# Allegro board SMA_Prototype_Drain.brd
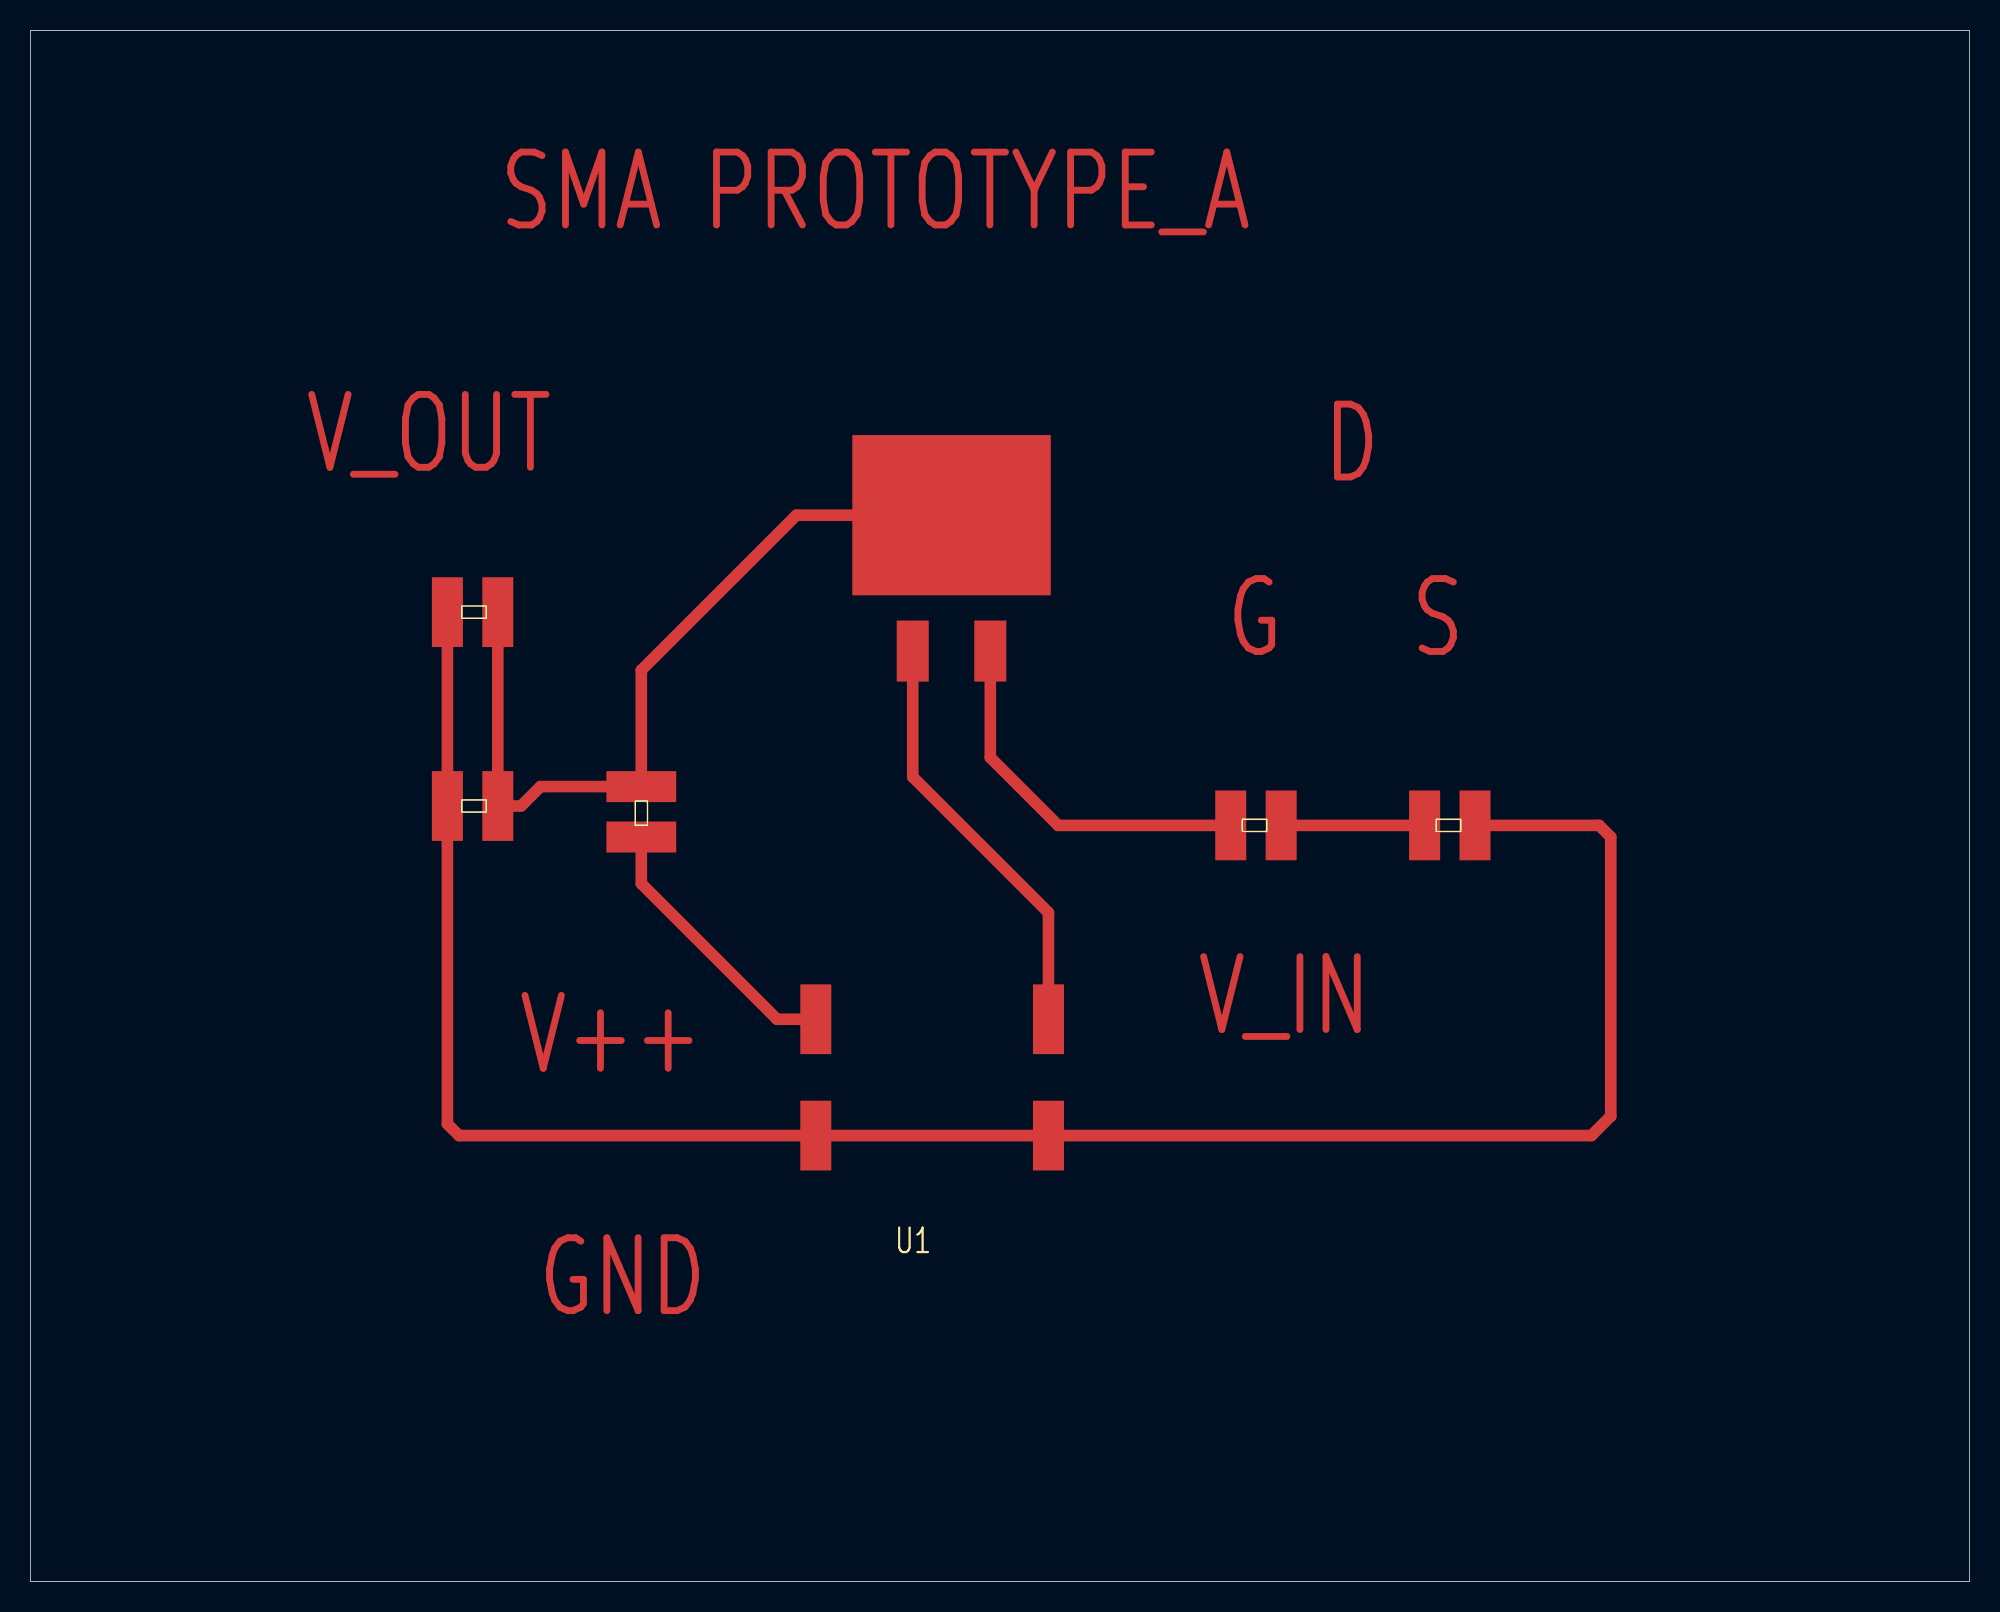
[diagram p0: board, top side]
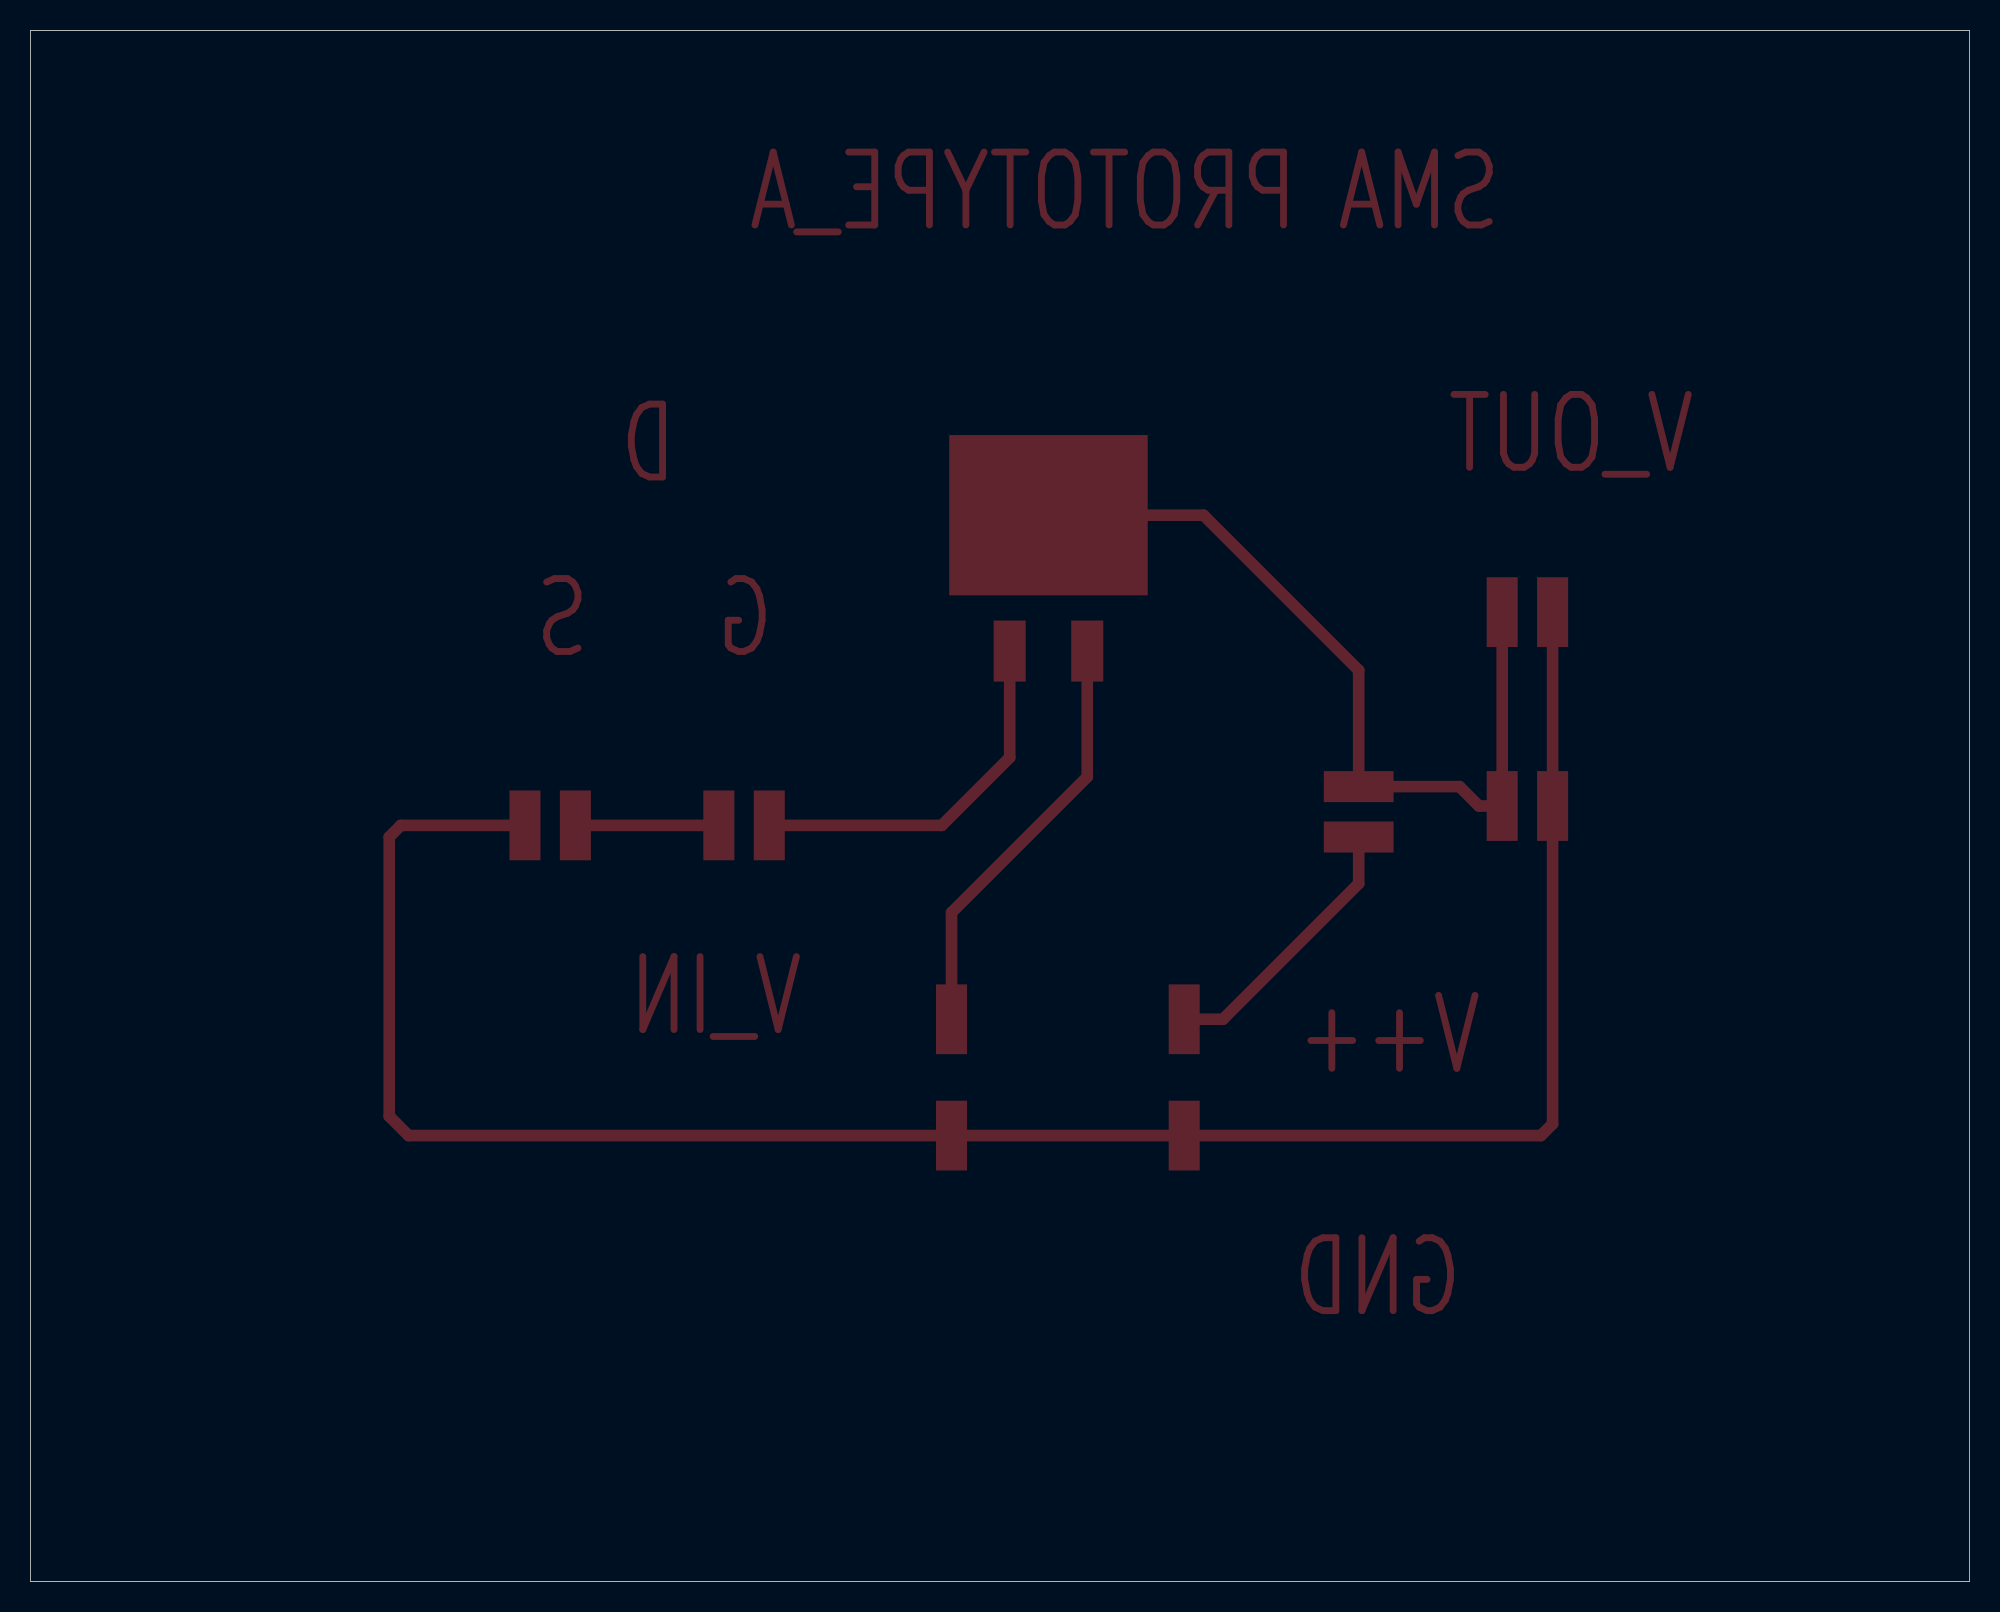
[diagram p1: board, bottom side, seen from below]

Outline 127 x 101.6 mm; copper layers: TOP, BOTTOM. Coordinates in mm from the lower left corner of the outline.
Outline path: 0,101.6 0,0 127,0 127,101.6 0,101.6

## Design rules (mm)
constraint set DEFAULT: min track width 0.127

## Placement (name value [footprint] x y rotation side)
C1  CAPACITOR  [LARGE_R_C]  29.84 63.5 180 top
C2  CAPACITOR  [LARGE_R_C]  29.84 50.8 180 top
Q1  MOSFET N  [STFW3N150]  60.33 69.85 0 top
R1  RESISTOR  [LARGE_R_C]  92.08 49.53 0 top
R2  RESISTOR  [LARGE_R_C]  40.01 49.53 90 top
R3  RESISTOR  [LARGE_R_C]  79.38 49.53 0 top
U1  -  [B00JVJDEZE]  51.44 34.29 0 top

## Library data of the parts
C1 C2 = CAPACITOR
Q1 = MOSFET N
R1-R3 = RESISTOR
U1 = B00JVJDEZE

## Footprints (pads in the part's own frame, mm; a bottom-side part is the same pattern mirrored in y, then rotated)
B00JVJDEZE
  rect 2.032x4.572 smd: 1(15.24,2.54) 2(0,-5.08) 3(0,2.54) 4(15.24,-5.08)
LARGE_R_C
  rect 2.032x4.572 smd: 1(-0.762,0) 2(2.54,0)
STFW3N150
  rect 2.1x4 smd: 1(-2.54,-8.9) 3(2.54,-8.9)
  rect 13x10.5 smd: 2(0,0)

## Nets
GND: C1.2 C2.2 R1.2 U1.2 U1.4(VOUT-)
N00192: R2.1 U1.3
N00243: C1.1 C2.1 Q1.2 R2.2
N00360: Q1.1 U1.1
N00852: R1.1 R3.2
N00856: Q1.3(SOURCE) R3.1

## Routing (per net, layer and track width the routed paths; a pad name or vN(x,y) marks a point on that pad's centre or on a via; arc(x,y) is an arc through that point)
GND: length 138.1
  TOP w0.762: R1.2 102.74,49.53 103.5,48.77 103.5,30.48 102.23,29.21 U1.4 U1.2 28.07,29.21 27.3,29.97 C2.2 C1.2
N00192: length 18.2
  TOP w0.762: U1.3 48.9,36.83 40.01,45.72 R2.1
N00243: length 54.8
  TOP w0.762: C1.1 C2.1 32.13,50.8 33.4,52.07 R2.2 40.01,59.69 50.16,69.85 Q1.2
N00360: length 27.8
  TOP w0.762: U1.1 66.67,43.81 57.78,52.7 57.78,60.95
N00852: length 9.4
  TOP w0.762: R3.2 R1.1
N00856: length 24.6
  TOP w0.762: Q1.3 62.87,53.97 67.31,49.53 R3.1

## Text on the board
TOP: V_OUT | SMA PROTOTYPE_A | V++ | GND | V_IN | G | D | S
